# EAGLE board ardBeeQueen_12-pin_lcd no holes (EAGLE 9.5.1)
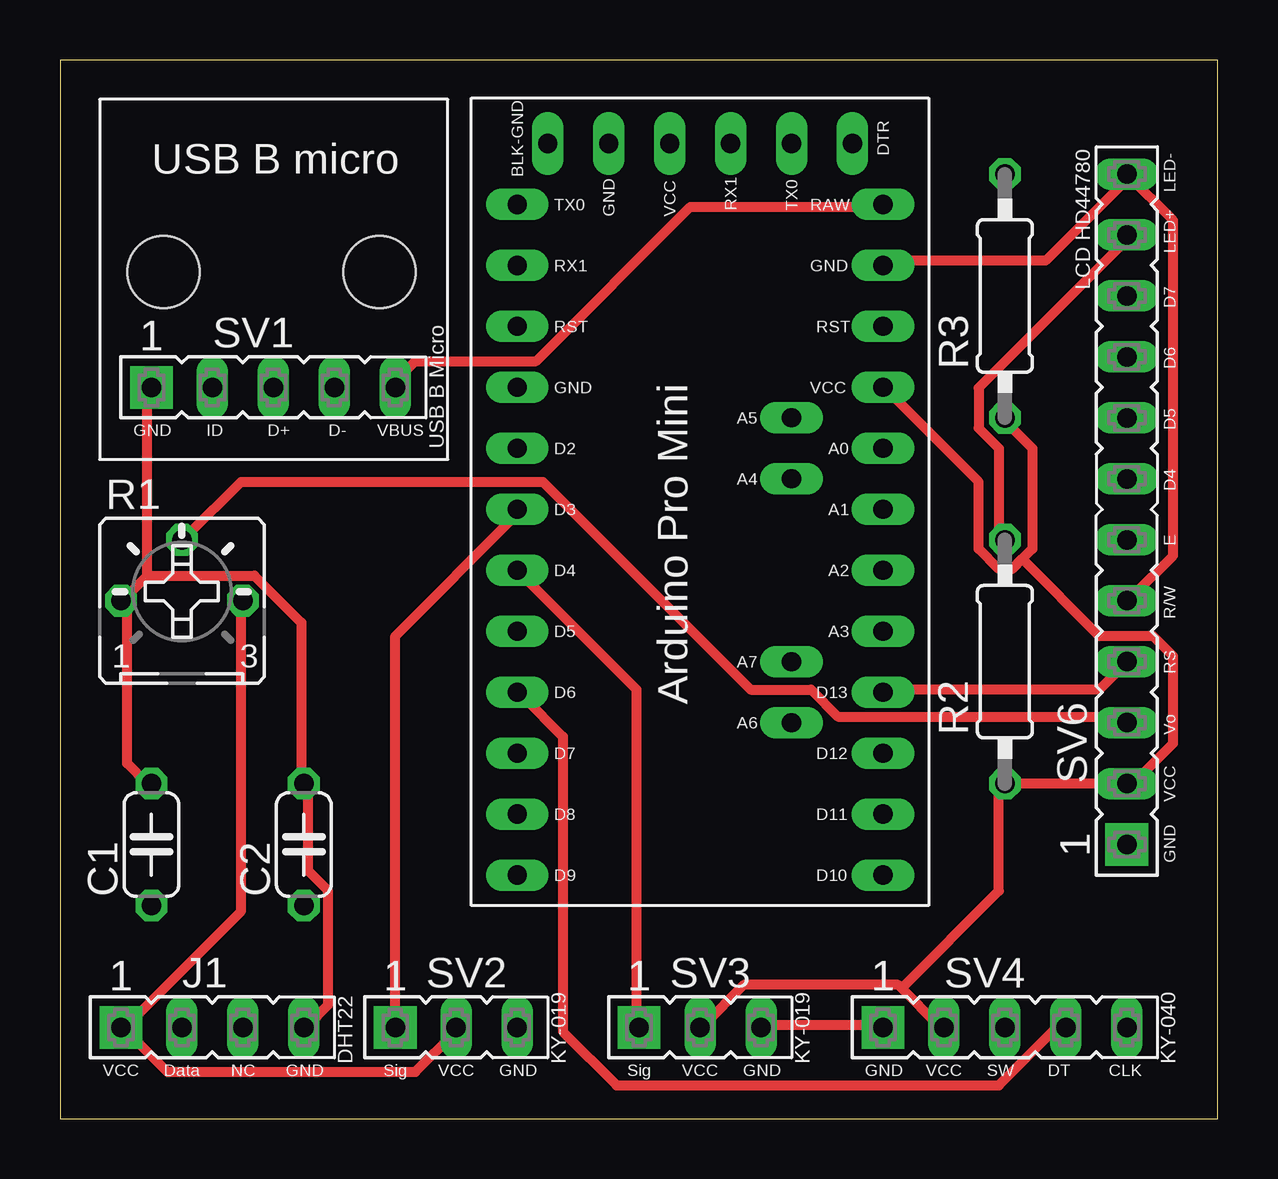
[diagram p0: board, top side]
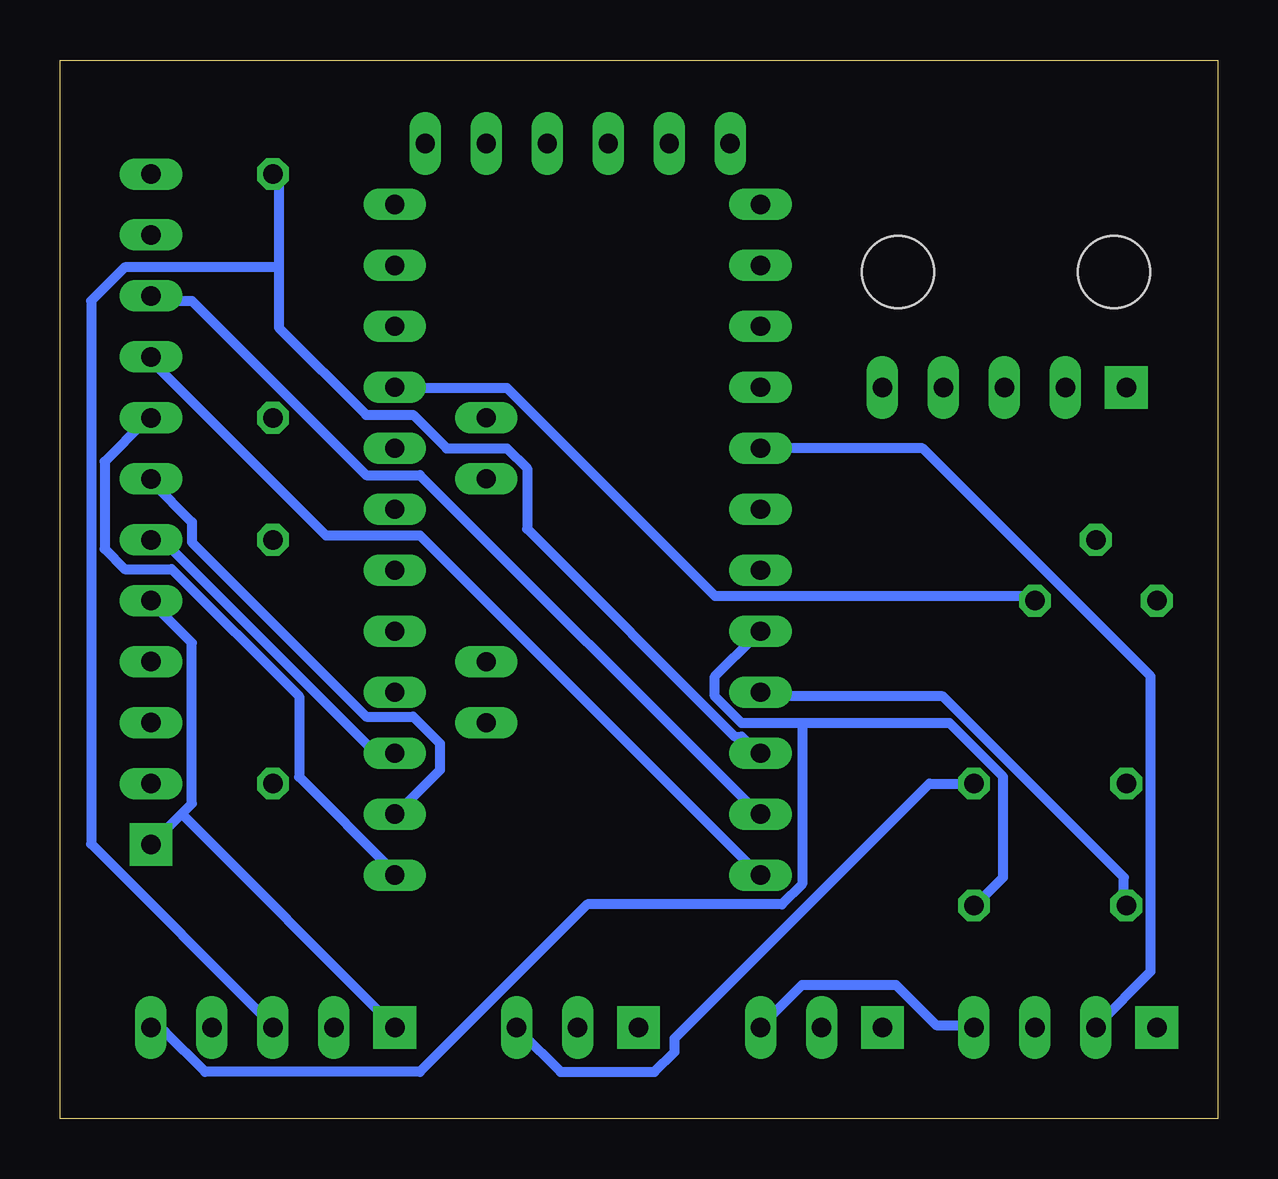
[diagram p1: board, bottom side, seen from below]

Size 48.24 x 44.12 mm. Coordinates in mm from the lower left corner, seen from the top.
Outline: 0,0 48.24,0 48.24,44.12 0,44.12 0,0
Copper layers (1*16): Top 0.035mm / dielectric 1.5mm / Bottom 0.035mm
Design rules "default": minimum track width 6mil, minimum drill 0.35mm, track to track 6mil, track to pad 6mil, pad to pad 6mil, via to via 6mil, smd to smd 6mil, copper to edge 40mil, drill to drill 6mil, minimum pad ring 10mil, minimum via ring 8mil, stop-mask expansion 4mil, vias tented up to drill 0mil, thermal gap 10mil
Net classes: 0 default: width 0.406 mm, clearance 0.152 mm

## Footprints (pad centres in the part's own frame; a part is rotated, then mirrored left to right if it is on the bottom)
C050-024X044 = drill 0.813 octagon: 1 -2.54,0; 2 2.54,0
DHT22_4-PIN_FEMALE_HEADER = drill 0.813 long: DATA 2.54,0; GND 7.62,0; NC 5.08,0 | drill 0.813 pad 1.778 square: VCC 0,0
B25P = drill 0.813 octagon: A -2.54,0; E 2.54,0; S 0,2.54
0207/10 = drill 0.813 octagon: 1 -5.08,0; 2 5.08,0
MICROUSB_B_BREAKOUT_5-PIN_FEMALE_HEADER_W_MOUNT_HOLES = drill 0.813 long: D+ 5.08,0; D- 7.62,0; ID 2.54,0; VBUS 10.16,0 | drill 0.813 pad 1.778 square: GND 0,0 | hole 3: 0.508,4.81; 9.508,4.81
KY-019_3-PIN_FEMALE_HEADER = drill 0.813 long: GND 5.08,0; VCC 2.54,0 | drill 0.813 pad 1.778 square: SIG 0,0
KY-040_5-PIN_FEMALE_HEADER = drill 0.813 long: CLK 10.16,0; DT 7.62,0; SW 5.08,0; VCC 2.54,0 | drill 0.813 pad 1.778 square: GND 0,0
LCD-HD44780-12-PIN_FEMALE_HEADER = drill 0.813 long: D4 15.24,0; D5 17.78,0; D6 20.32,0; D7 22.86,0; E 12.7,0; LED+ 25.4,0; LED- 27.94,0; R/W 10.16,0; RS 7.62,0; VCC 2.54,0; VO 5.08,0 | drill 0.813 pad 1.778 square: GND 0,0
ARDUINO_PRO_MINI-2 = drill 0.8 long: A0 6.35,2.54; A1 6.35,0; A2 6.35,-2.54; A3 6.35,-5.08; A4 2.54,1.27; A5 2.54,3.81; A6 2.54,-8.89; A7 2.54,-6.35; BLK-GND -7.62,15.24; D2 -8.89,2.54; D3 -8.89,0; D4 -8.89,-2.54; D5 -8.89,-5.08; D6 -8.89,-7.62; D7 -8.89,-10.16; D8 -8.89,-12.7; D9 -8.89,-15.24; D10 6.35,-15.24; D11 6.35,-12.7; D12 6.35,-10.16; D13 6.35,-7.62; DTR 5.08,15.24; GND 6.35,10.16; GND1 -8.89,5.08; GND3 -5.08,15.24; RAW 6.35,12.7; RST 6.35,7.62; RST1 -8.89,7.62; RX1 -8.89,10.16; RX1-1 0,15.24; TX0 -8.89,12.7; TX0-1 2.54,15.24; VCC 6.35,5.08; VCC1 -2.54,15.24

## Placement (x,y rotation side)
C1  0,47u  [C050-024X044]  3.81,11.43 90 top
C2  0.47u  [C050-024X044]  10.16,11.43 90 top
J1  [DHT22_4-PIN_FEMALE_HEADER]  2.54,3.81 0 top
R1  10K  [B25P]  5.08,21.59 0 top
R2  220R  [0207/10]  39.37,19.05 90 top
R3  10K  [0207/10]  39.37,34.29 90 top
SV1  [MICROUSB_B_BREAKOUT_5-PIN_FEMALE_HEADER_W_MOUNT_HOLES]  3.81,30.48 0 top
SV2  [KY-019_3-PIN_FEMALE_HEADER]  13.97,3.81 0 top
SV3  [KY-019_3-PIN_FEMALE_HEADER]  24.13,3.81 0 top
SV4  [KY-040_5-PIN_FEMALE_HEADER]  34.29,3.81 0 top
SV6  [LCD-HD44780-12-PIN_FEMALE_HEADER]  44.45,11.43 90 top
U$1  ARDUINO_PRO_MINI-2  [ARDUINO_PRO_MINI-2]  27.94,25.4 0 top

## Library data of the parts
C1 C2 = rcl; SPICEPREFIX: C
J1 = myLib-01-Headers; PROD_ID: CONN-09696
R1 = pot
R2 R3 = rcl; SPICEPREFIX: R
SV1 SV6 = myLib-01-Headers
SV2-SV4 = myLib-01-Headers; OC_FARNELL: unknown; OC_NEWARK: unknown
U$1 = myLib-02-Arduino

## Nets
N$1: R1.S SV6.VO
N$2: R2.2 SV6.LED+
N$3: SV6.D6 U$1.D9
N$4: SV6.D7 U$1.D8
N$5: SV6.D5 U$1.D10
N$6: SV6.D4 U$1.D11
N$7: SV6.E U$1.D12
N$8: SV6.RS U$1.D13
N$9: R3.2 SV4.SW U$1.D7
N$10: C1.1 SV4.DT U$1.D6
N$11: C2.1 SV4.CLK U$1.D5
N$12: J1.DATA U$1.D2
N$13: SV2.SIG U$1.D3
N$14: SV3.SIG U$1.D4
N$15: J1.VCC R1.E R2.1 R3.1 SV2.VCC SV3.VCC SV4.VCC SV6.VCC U$1.VCC
N$16: C1.2 C2.2 J1.GND R1.A SV1.GND SV2.GND SV3.GND SV4.GND SV6.GND SV6.LED- SV6.R/W U$1.GND
N$17: SV1.VBUS U$1.RAW

## Tracks (layer width: path | path; a pad name or v marks a point on that pad's centre or on a via)
N$1
  Top 0.406: SV6.VO 44.42,16.76 32.41,16.76 31.29,17.88 28.78,17.88 20.12,26.54 7.54,26.54 5.31,24.31 R1.S
N$2
  Top 0.406: R2.2 39.12,24.31 39.12,27.94 38.28,28.78 38.28,30.45 44.42,36.6 SV6.LED+
N$3
  Bottom 0.406: U$1.D9 19.28,10.34 33.25,24.31 37.16,24.31 44.42,31.57 SV6.D6
N$4
  Bottom 0.406: U$1.D8 19.28,12.85 33.25,26.82 35.48,26.82 42.75,34.09 44.42,34.09 SV6.D7
N$5
  Bottom 0.406: U$1.D10 34.37,10.34 38.28,14.25 38.28,17.6 43.59,22.91 45.54,22.91 46.38,23.75 46.38,27.38 44.7,29.06 SV6.D5
N$6
  Bottom 0.406: U$1.D11 34.09,12.85 32.41,14.53 32.41,15.65 33.53,16.76 35.48,16.76 42.75,24.03 42.75,24.87 44.42,26.54 SV6.D4
N$7
  Bottom 0.406: U$1.D12 34.37,15.37 35.2,15.37 43.87,24.03 44.42,24.03 SV6.E
N$8
  Top 0.406: U$1.D13 34.37,17.88 43.31,17.88 44.42,19 SV6.RS
N$9
  Bottom 0.406: 39.12,35.48 39.12,39.12 R3.2 | 39.12,35.48 39.12,32.97 35.48,29.34 33.53,29.34 32.13,27.94 29.62,27.94 28.78,27.1 28.78,24.59 20.12,15.93 19.84,15.93 19.28,15.37 U$1.D7 | 39.12,35.48 45.54,35.48 46.94,34.09 46.94,11.45 39.4,3.91 SV4.SW
N$10
  Top 0.406: SV4.DT 41.91,3.63 41.35,3.63 39.12,1.4 23.19,1.4 20.95,3.63 20.95,15.93 19.28,17.6 U$1.D6
  Bottom 0.406: U$1.D6 19,17.6 11.46,17.6 3.91,10.06 3.91,8.94 C1.1
N$11
  Bottom 0.406: 17.32,16.48 11.18,16.48 8.94,14.25 8.94,10.06 10.06,8.94 C2.1 | 17.32,16.48 19.84,16.48 20.95,17.6 20.95,18.44 19.28,20.12 U$1.D5 | 17.32,16.48 17.32,9.78 18.16,8.94 26.26,8.94 33.25,1.96 42.19,1.96 43.87,3.63 44.42,3.63 SV4.CLK
N$12
  Bottom 0.406: U$1.D2 12.29,27.94 2.79,18.44 2.79,6.15 5.03,3.91 J1.DATA
N$13
  Top 0.406: SV2.SIG 13.97,20.12 19,25.15 U$1.D3
N$14
  Top 0.406: U$1.D4 24.03,17.88 24.03,3.91 SV3.SIG
N$15
  Top 0.406: SV2.VCC 16.48,3.63 14.81,1.96 4.47,1.96 2.79,3.63 J1.VCC 2.79,3.91 7.54,8.66 7.54,21.51 R1.E | 40.09,23.33 40.51,23.75 40.51,27.94 39.4,29.06 R3.1 | 40.09,23.33 39.67,22.91 39.12,22.91 38.28,23.75 38.28,26.54 34.37,30.45 U$1.VCC | 35.06,5.45 36.6,3.91 SV4.VCC | 35.06,5.45 34.92,5.59 28.5,5.59 26.82,3.91 SV3.VCC | 35.06,5.45 39.12,9.5 39.12,13.97 R2.1 SV6.VCC 44.7,13.97 46.38,15.65 46.38,19.28 45.54,20.12 43.31,20.12 40.09,23.33
  Bottom 0.406: R1.E 7.82,21.79 20.95,21.79 29.62,30.45 34.09,30.45 U$1.VCC
N$16
  Top 0.406: J1.GND 10.34,3.91 11.18,4.75 11.18,9.5 10.34,10.34 10.34,13.97 C2.2 10.06,13.97 10.06,20.68 8.1,22.63 3.63,22.63 | C1.2 3.63,13.97 2.79,14.81 2.79,21.51 R1.A 2.79,21.79 3.63,22.63 | 3.63,22.63 3.63,30.45 SV1.GND | U$1.GND 34.37,35.76 41.07,35.76 44.42,39.12 SV6.LED- 46.38,37.44 46.38,23.47 44.7,21.79 SV6.R/W | SV3.GND 29.34,3.91 34.09,3.91 SV4.GND
  Bottom 0.406: J1.GND 10.34,3.91 11.73,3.91 13.41,5.59 17.32,5.59 19,3.91 SV2.GND | SV6.GND 43.17,12.71 | 43.17,12.71 42.75,13.13 42.75,19.84 44.42,21.51 SV6.R/W | 43.17,12.71 34.37,3.91 SV4.GND | C2.2 12.01,13.97 22.63,3.35 22.63,2.79 23.47,1.96 27.38,1.96 29.06,3.63 SV3.GND
N$17
  Top 0.406: U$1.RAW 34.09,38 26.26,38 19.84,31.57 14.81,31.57 13.97,30.73 SV1.VBUS